# EAGLE board ESCpower (EAGLE 5.11)
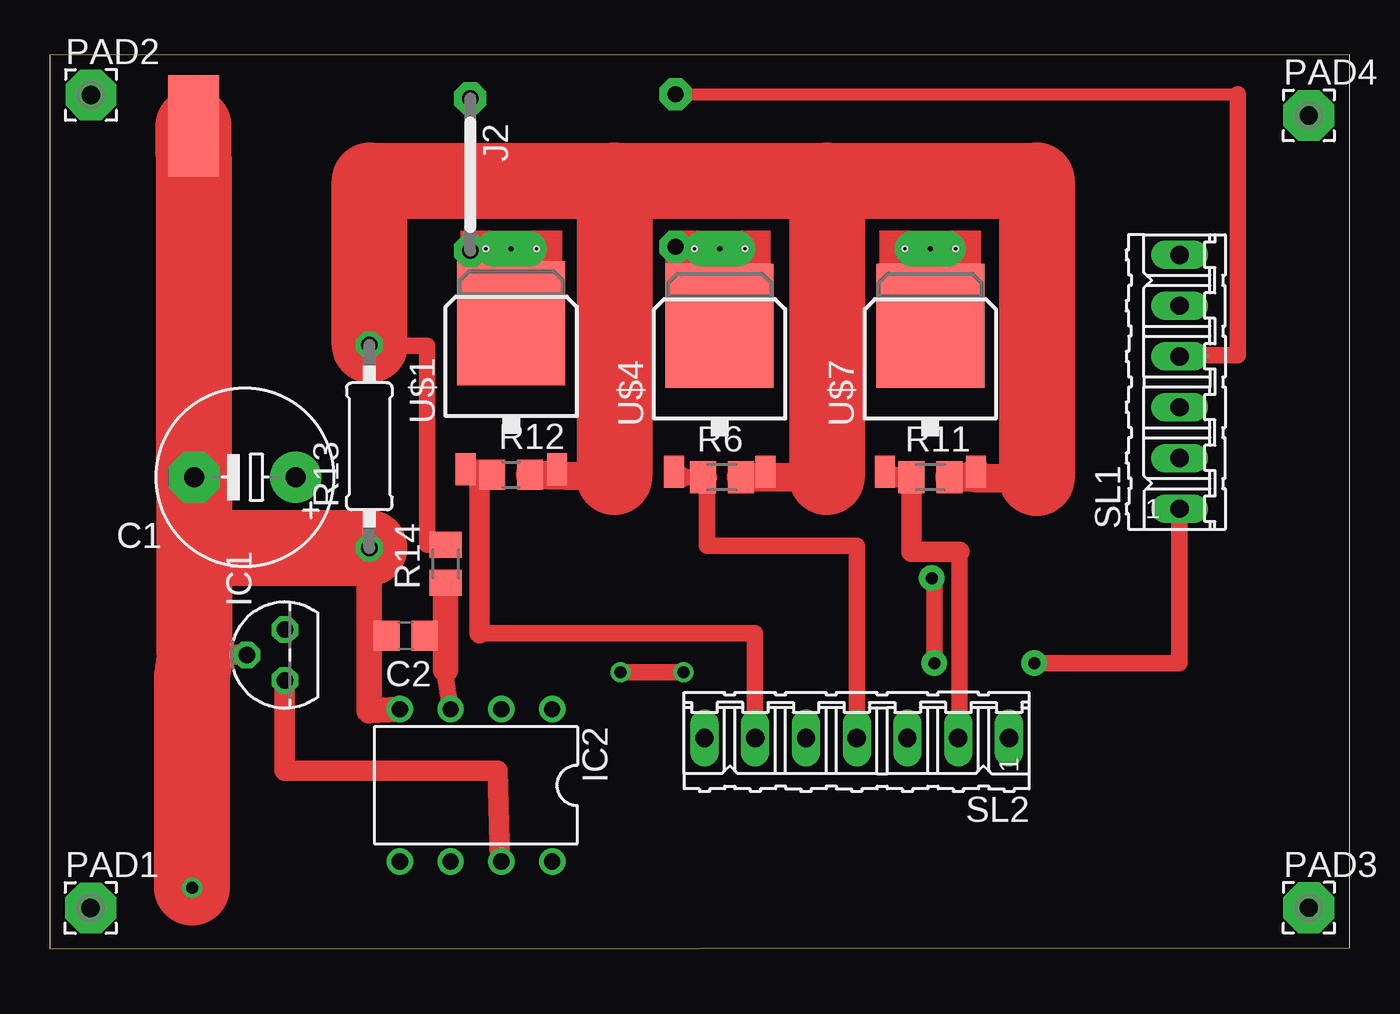
[diagram p0: board, top side]
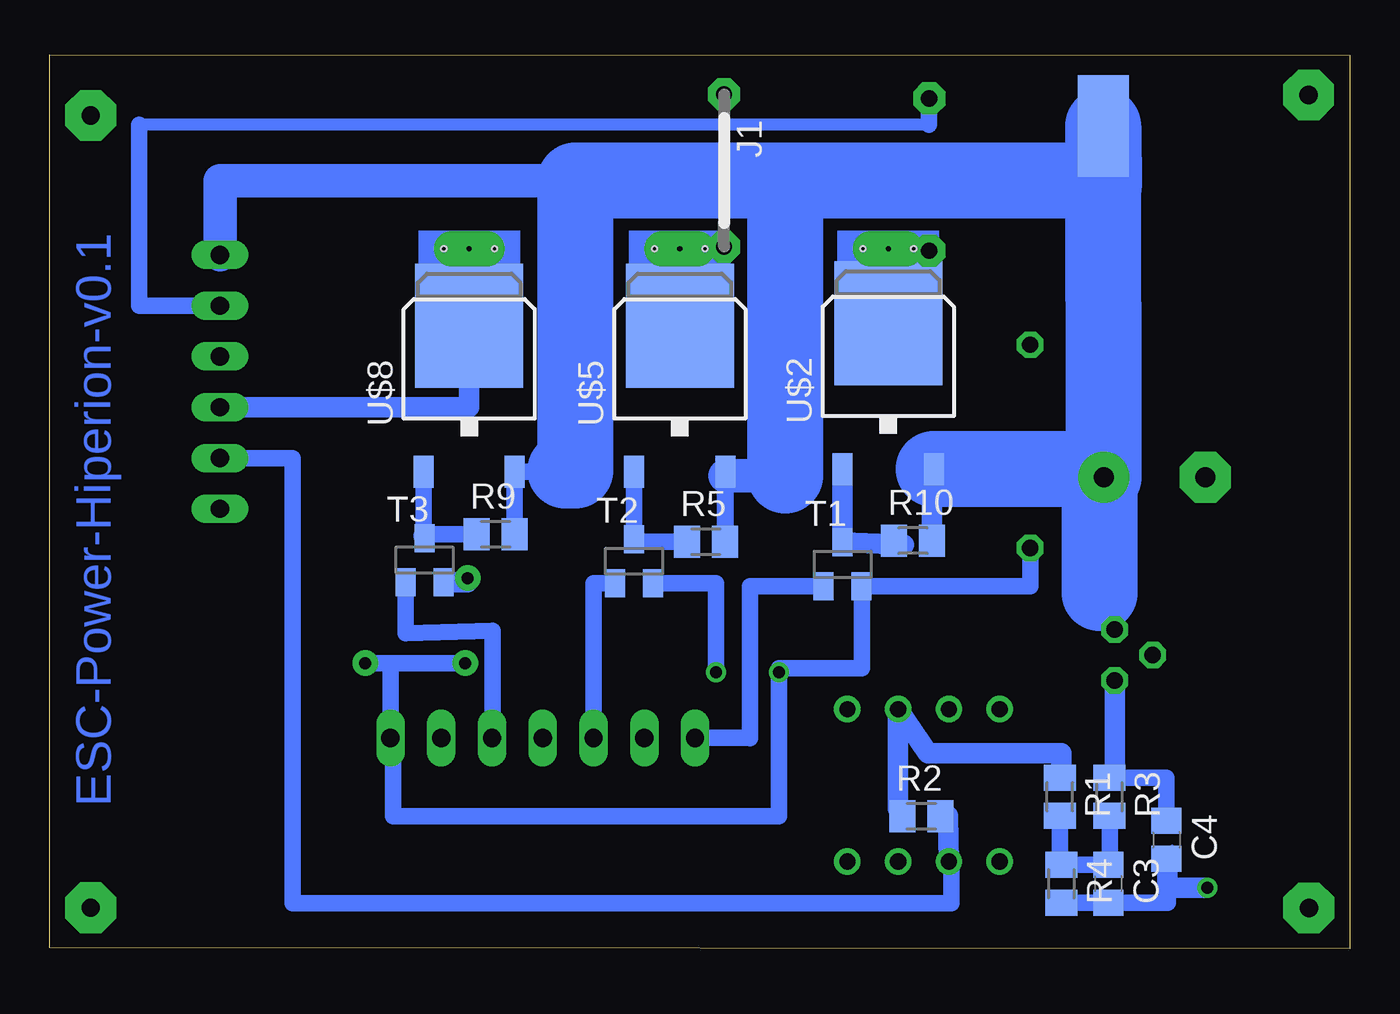
[diagram p1: board, bottom side, seen from below]

Size 65.02 x 44.7 mm. Coordinates in mm from the lower left corner, seen from the top.
Outline: 0,0 65.02,0.05 65.02,44.7 0,44.68 0,0
Copper layers (1*16): Top 0.035mm / dielectric 1.5mm / Bottom 0.035mm
Design rules "default": minimum track width 10mil, minimum drill 24mil, track to track 8mil, track to pad 8mil, pad to pad 8mil, via to via 8mil, smd to smd 8mil, copper to edge 40mil, drill to drill 8mil, minimum pad ring 10mil, minimum via ring 8mil, stop-mask expansion 4mil, vias tented up to drill 0mil, thermal gap 10mil

## Footprints (pad centres in the part's own frame; a part is rotated, then mirrored left to right if it is on the bottom)
BATTERY_CONNECTOR = smd 5.08 x 2.54: P$1 0,0
E5-8,5 = drill 1.016 pad 2.54 round: + -2.54,0 | drill 1.016 pad 2.54 octagon: - 2.54,0
C0805 = smd 1.3 x 1.5: 1 -0.95,0; 2 0.95,0
TO92 = drill 0.813 octagon: 1 -1.27,0; 2 0,1.905; 3 1.27,0
DIL08 = drill 0.813 pad 1.27 round: 1 -3.81,-3.81; 2 -1.27,-3.81; 3 1.27,-3.81; 4 3.81,-3.81; 5 3.81,3.81; 6 1.27,3.81; 7 -1.27,3.81; 8 -3.81,3.81
07 = drill 0.813 pad 1.6 octagon: 1 -3.81,0; 2 3.81,0
2,54/0,9 = drill 0.914 pad 2.54 octagon: 1 0,0
M0805 = smd 1.3 x 1.6: 1 -0.95,0; 2 0.95,0
R0805 = smd 1.3 x 1.5: 1 -0.95,0; 2 0.95,0
0207/10 = drill 0.813 octagon: 1 -5.08,0; 2 5.08,0
06P = drill 0.914 long: 1 -6.35,0; 2 -3.81,0; 3 -1.27,0; 4 1.27,0; 5 3.81,0; 6 6.35,0
07P = drill 0.914 long: 1 -7.62,0; 2 -5.08,0; 3 -2.54,0; 4 0,0; 5 2.54,0; 6 5.08,0; 7 7.62,0
SOT23 = smd 1 x 1.4: 1 -0.95,-1.1; 2 0.95,-1.1; 3 0,1.1
DPAK = smd 1 x 1.6: 1 -2.28,-4.8; 3 2.28,-4.8 | smd 5.4 x 6.2: 4 0,2.5
MOTOR_CONNECTOR = drill 0.254 pad 1.778 long: PINO 0,0 | hole 0.254: -1.27,0; 1.27,0

## Placement (x,y rotation side)
BATTERY+  Battery+  [BATTERY_CONNECTOR]  12.32,41.13 270 bottom
C1  [E5-8,5]  9.75,23.57 180 top
C2  100n  [C0805]  17.8,15.63 180 top
C3  100n  [C0805]  12.07,3.25 270 bottom
C4  100n  [C0805]  9.16,5.44 270 bottom
IC1  7805L  [TO92]  11.75,14.68 90 top
IC2  TL071P  [DIL08]  21.31,8.16 180 top
J1  J7MM  [07]  31.29,38.91 270 bottom
J2  J7MM  [07]  21.03,38.71 270 top
PAD1  [2,54/0,9]  2.03,2.03 0 top
PAD2  [2,54/0,9]  2.05,42.69 0 top
PAD3  [2,54/0,9]  62.99,2.04 0 top
PAD4  [2,54/0,9]  62.98,41.67 0 top
R1  4k7  [M0805]  14.5,7.58 270 bottom
R2  18k  [M0805]  21.41,6.61 0 bottom
R3  4k7  [M0805]  12.01,7.58 270 bottom
R4  4k7  [M0805]  14.41,3.25 270 bottom
R5  470  [M0805]  32.21,20.34 0 bottom
R6  18k  [M0805]  33.63,23.57 0 top
R9  470  [M0805]  42.73,20.71 0 bottom
R10  470  [M0805]  21.83,20.4 0 bottom
R11  18k  [M0805]  44.04,23.57 0 top
R12  18k  [R0805]  23.08,23.7 0 top
R13  SHUNT  [0207/10]  15.98,25.12 90 top
R14  4k7  [M0805]  19.79,19.24 90 top
SL1  [06P]  56.51,28.34 90 top
SL2  [07P]  40.36,10.53 180 top
T1  BC850  [SOT23]  25.36,19.22 0 bottom
T2  BC850  [SOT23]  35.8,19.37 0 bottom
T3  BC850  [SOT23]  46.28,19.43 0 bottom
U$1  IRFR1205  [DPAK]  23.08,28.78 0 top
U$2  IRFR5305  [DPAK]  23.08,28.78 0 bottom
U$3  MOTOR_CONNECTOR  [MOTOR_CONNECTOR]  23.08,35 0 top
U$4  IRFR1205  [DPAK]  33.51,28.65 0 top
U$5  IRFR5305  [DPAK]  33.51,28.65 0 bottom
U$6  MOTOR_CONNECTOR  [MOTOR_CONNECTOR]  33.51,35 0 top
U$7  IRFR1205  [DPAK]  44.04,28.65 0 top
U$8  IRFR5305  [DPAK]  44.04,28.65 0 bottom
U$9  MOTOR_CONNECTOR  [MOTOR_CONNECTOR]  44.04,35 0 top
U$11  BATTERY_CONNECTOR  [BATTERY_CONNECTOR]  7.18,41.13 270 top

## Library data of the parts
BATTERY+ U$1-U$9 U$11 = ESC
C1-C4 R1-R6 R9-R14 = rcl
IC1 IC2 = linear
J1 J2 = jumper
PAD1-PAD4 = wirepad
SL1 SL2 = con-amp-quick; OC_FARNELL: unknown; OC_NEWARK: unknown
T1-T3 = transistor

## Nets
FASE_U: J2.2 U$1.4 U$2.4 U$3.PINO
FASE_V: J1.2 U$4.4 U$5.4 U$6.PINO
FASE_W: SL1.3 U$7.4 U$8.4 U$9.PINO
GND: C1.- C2.2 C3.2 C4.2 IC1.2 IC2.4 R4.2 R13.1 SL1.1 SL2.1 T1.2 T2.2 T3.2 U$11.P$1
N$1: IC2.2 R1.1 R2.1
N$2: R10.1 T1.3 U$2.1
N$3: J2.1 SL1.5
N$4: J1.1 SL1.4
N$6: R5.1 T2.3 U$5.1
N$10: R9.1 T3.3 U$8.1
N$13: C2.1 IC2.3 R14.1
PWR_MTR: IC2.6 R2.2 SL1.2
UH_PWM: SL2.7 T1.1
UL_PWM: R12.1 SL2.6 U$1.1
VCC: C4.1 IC1.1 IC2.7 R3.1
VDD: BATTERY+.P$1 C1.+ IC1.3 R5.2 R9.2 R10.2 SL1.6 U$2.3 U$5.3 U$8.3
VH_PWM: SL2.5 T2.1
VL_PWM: R6.1 SL2.4 U$4.1
VREF: C3.1 R1.2 R3.2 R4.1
VSHUNT: R6.2 R11.2 R12.2 R13.2 R14.2 U$1.3 U$4.3 U$7.3
WH_PWM: SL2.3 T3.1
WL_PWM: R11.1 SL2.2 U$7.1

## Tracks (layer width: path | path; a pad name or v marks a point on that pad's centre or on a via)
FASE_U
  Top 0.406: U$3.PINO U$1.4
  Bottom 1.016: J2.2 21.03,34.54 23.08,34.54 U$1.4 U$3.PINO
FASE_V
  Top 1.016: U$4.4 33.51,34.54 33.53,34.54 33.53,31.15 U$4.4 | U$4.4 31.29,31.15 J1.2
  Bottom 1.016: 33.51,34.54 U$6.PINO | J1.2 33.53,35.1 33.53,34.54 | 33.53,34.54 33.51,34.54 | 33.51,34.54 31.5,34.54 | U$4.4 35.56,31.15 33.53,34.54
FASE_W
  Top 1.016: U$9.PINO U$7.4
  Bottom 1.016: SL1.3 44.04,27.07 U$7.4 U$9.PINO
GND  (via drill 0.6, 0.6 pad 1.27)
  Top 0.813: v44.24,14.28 44.24,18.53 | v49.24,14.28 56.51,14.28 SL1.1 | C2.2 15.98,15.63 15.75,12.8 15.75,11.89 15.98,11.89 | v28.55,13.82 v31.7,13.82
  Top 1.016: 7.28,14.58 7.24,14.68 IC1.2 | 44.24,18.53 v44.12,18.53
  Top 1.27: R13.1 15.98,11.89 IC2.4
  Top 3.81: U$11.P$1 7.21,38.07 C1.- 7.24,23.57 7.24,20.04 | 7.24,20.04 R13.1 | 7.24,14.68 7.24,20.04 | 7.28,14.58 7.11,13.56 v7.11,3.05
  Bottom 0.254: C4.2 8.89,5.08 8.89,3.81 9.12,3.81 | 48.16,10.36 48.26,10.16 SL2.1
  Bottom 0.813: 47.98,14.28 v44.24,14.28 | SL2.1 47.98,14.28 | 47.98,14.28 v49.24,14.28 | R4.2 C3.2 9.08,2.3 9.12,4.06 9.13,4.49 | R13.1 15.98,18.12 T1.2 24.38,18.12 24.38,14.02 28.45,14.02 | 28.45,14.02 28.55,14.02 v28.55,13.82 | v28.55,13.82 28.55,6.6 47.85,6.6 47.85,10.36 48.16,10.36 48.16,10.77 47.95,10.77 47.95,10.26 | T2.2 31.7,18.27 v31.7,13.82 | v28.55,13.82 28.45,13.82 28.45,14.02
  Bottom 1.016: T3.2 44.12,18.33 v44.12,18.53 | v7.11,3.05 9.12,3.05 | 9.12,3.05 9.14,3.05 | 9.12,3.05 9.12,3.81 9.12,4.06
N$1
  Bottom 1.016: R2.1 22.58,6.98 IC2.2 21.09,9.78 14.42,9.78 14.42,8.47 R1.1
N$2
  Bottom 1.016: U$2.1 T1.3 22.28,20.19 R10.1
N$3
  Bottom 0.61: 21.03,41.2 60.55,41.2
  Bottom 0.813: SL1.5 60.55,32.15 60.55,41.2 | J2.1 21.03,41.2
N$4
  Top 0.61: J1.1 59.44,42.72
  Top 0.813: 59.44,42.72 59.44,29.67 56.39,29.67 56.39,29.57 56.51,29.57 SL1.4
N$6
  Bottom 0.813: 35.79,20.32 U$5.1 | R5.1 35.8,20.34
  Bottom 1.016: 35.79,20.32 T2.3 35.8,20.34
N$10
  Bottom 0.813: 46.32,20.66 U$8.1 | R9.1 46.18,20.71
  Bottom 1.016: 46.32,20.66 T3.3 46.18,20.71
N$13
  Top 0.813: 19.79,13.93 19.74,13.83 IC2.3 | C2.1 19.61,15.63 19.61,15.54 19.51,15.54 19.51,15.24 19.79,15.24
  Top 1.27: 19.79,13.93 19.79,15.24 R14.1
PWR_MTR
  Bottom 0.813: SL1.2 52.87,24.53 52.87,2.25 19.92,2.25 19.92,4.35 IC2.6
  Bottom 1.016: IC2.6 20.09,6.65 R2.2
UH_PWM
  Bottom 0.813: T1.1 29.99,18.12 29.99,10.53 | 29.99,10.53 | 29.99,10.53 SL2.7
UL_PWM
  Top 0.813: 21.49,15.78 35.28,15.78 SL2.6
  Top 1.016: 21.49,23.57 21.55,23.95 U$1.1 | 21.49,23.57 R12.1 | 21.49,15.78 21.49,23.57
VCC
  Top 0.406: 22.53,4.38 22.58,4.38 IC2.7
  Top 1.016: 22.53,4.38 22.4,8.9 11.75,8.9 IC1.1
  Bottom 0.813: R3.1 9.16,8.53 9.16,7.88 C4.1
  Bottom 1.016: R3.1 11.75,8.53 IC1.1
VDD
  Bottom 0.813: R9.2 41.78,23.85 39.24,23.85 | 31.23,20.34 U$5.3 | 31.24,23.65 31.24,20.34
  Bottom 1.016: 41.78,23.85 U$8.3 | R5.2 31.24,20.34 31.23,20.34 | U$2.3 20.88,23.98 R10.2 | 12.49,17.78 11.75,16.28 IC1.3
  Bottom 1.676: 28.24,23.65 31.24,23.65 | C1.+ 12.29,23.98 | 39.24,23.9 39.24,23.85 | 38.74,38.4 56.51,38.4 SL1.6
  Bottom 3.81: 12.29,23.98 U$2.3 | 39.24,23.9 38.74,23.9 38.74,38.4 28.24,38.4 | 28.24,38.4 28.24,23.65 | 28.24,38.4 12.37,38.4 12.37,38.03 12.29,38.03 BATTERY+.P$1 C1.+ 12.49,23.57 12.49,17.78
VH_PWM
  Bottom 0.813: T2.1 37.82,18.27 SL2.5
VL_PWM
  Top 0.813: R6.1 31.6,23.57 | 32.87,23.57 32.87,20.15 40.36,20.15 SL2.4
  Top 1.016: 31.6,23.57 U$4.1 | 32.87,23.57 R6.1
VREF
  Bottom 0.813: R1.2 14.5,4.3 R4.1 C3.1 11.87,4.27 11.99,4.17 11.99,6.63 R3.2
VSHUNT
  Top 0.813: R14.2 18.87,20.19 18.87,30.15 15.98,30.15 R13.2
  Top 1.016: U$7.3 46.57,23.57 | 36.16,23.57 U$4.3 | R12.2 24.73,23.57 U$1.3
  Top 1.422: 46.57,23.57 R11.2 | R6.2 36.16,23.57 38.87,23.57 | 49.37,23.53 46.32,23.53 U$7.3 | 28.24,23.57 R12.2
  Top 2.184: R13.2 15.99,30.2
  Top 3.81: 15.99,30.2 15.99,38.4 28.24,38.4 | 28.24,38.4 38.87,38.4 | 38.87,38.4 49.37,38.4 49.37,23.53 | 38.87,38.4 38.87,23.57 | 28.24,38.4 28.24,23.57
WH_PWM
  Bottom 0.813: 42.87,10.53 42.87,15.9 47.23,15.78 T3.1
  Bottom 1.016: SL2.3 42.87,10.53
WL_PWM
  Top 0.813: 45.49,10.53 45.49,19.85
  Top 1.016: SL2.2 45.49,10.53 | 45.49,19.85 43.09,19.85 R11.1 41.76,23.57 U$7.1

## Text on the board
Bottom: ESC-Power-Hiperion-v0.1